# EAGLE board ArduinoBoardPOEv2 (EAGLE 7.4.0)
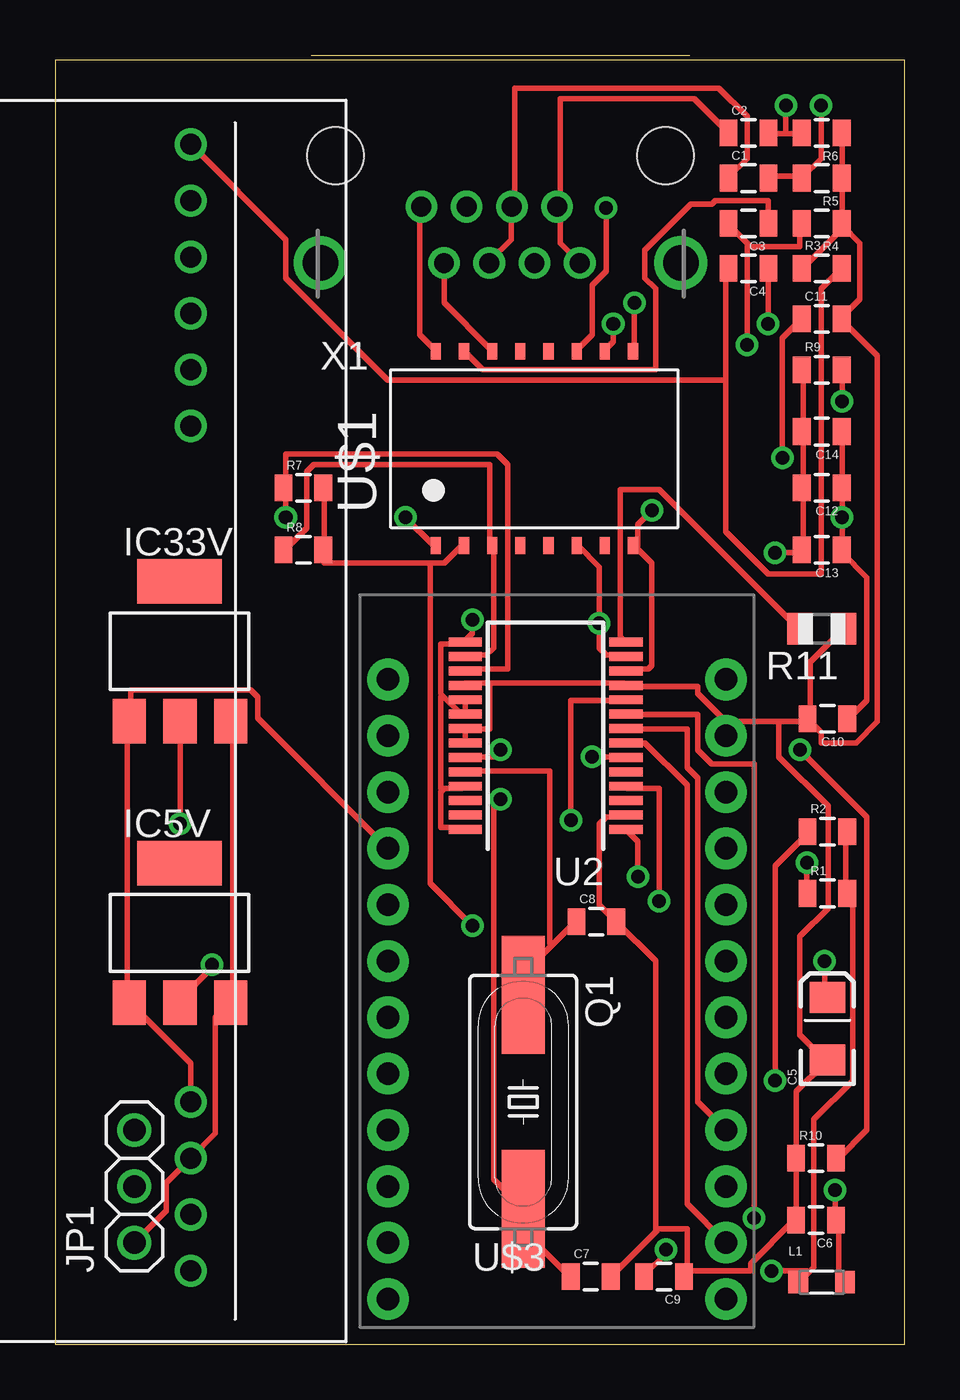
[diagram p0: board, top side]
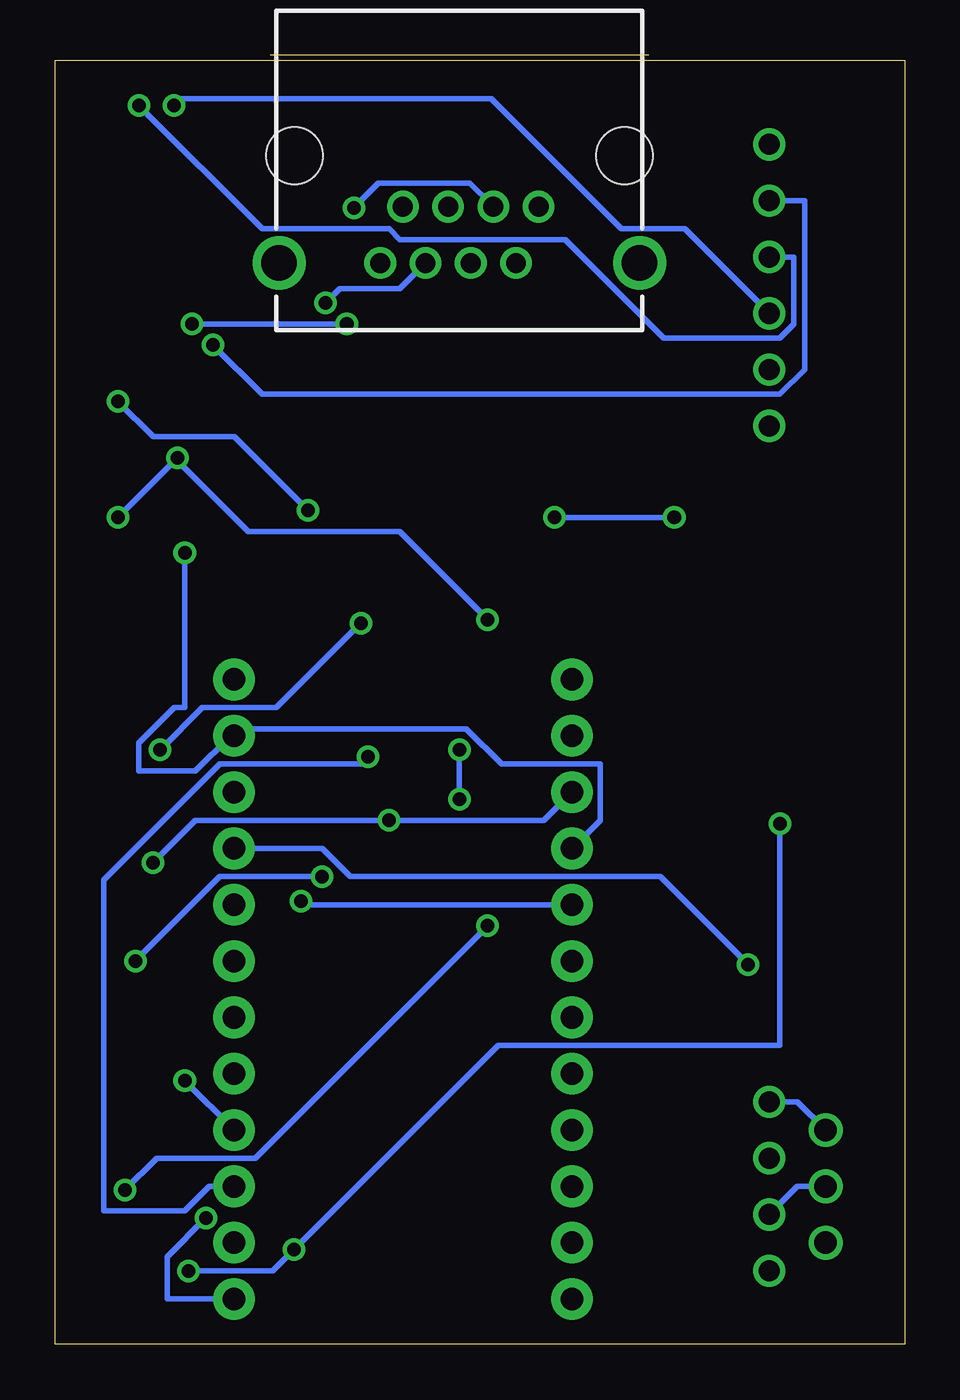
[diagram p1: board, bottom side, seen from below]

Size 38.28 x 57.9 mm. Coordinates in mm from the lower left corner, seen from the top.
Outline: 0,0 38.28,0 38.28,57.9 0,57.9 0,0
Copper layers (1*16): Top 0.035mm / dielectric 1.5mm / Bottom 0.035mm
Design rules "default": minimum track width 10mil, minimum drill 24mil, track to track 8mil, track to pad 8mil, pad to pad 8mil, via to via 8mil, smd to smd 8mil, copper to edge 40mil, drill to drill 8mil, minimum pad ring 10mil, minimum via ring 8mil, stop-mask expansion 4mil, vias tented up to drill 0mil, thermal gap 10mil

## Footprints (pad centres in the part's own frame; a part is rotated, then mirrored left to right if it is on the bottom)
0805 = smd 0.8 x 1.2: 1 -0.9,0; 2 0.9,0
EIA3216 = smd 1.4 x 1.6: A 1.4,0; C -1.4,0
SOT223 = smd 1.499 x 2.007: 1 -2.261,-3.15; 2 0.025,-3.15; 3 2.311,-3.15 | smd 3.81 x 2.007: 4 0,3.15
1X03 = drill 1.016: 1 -2.54,0; 2 0,0; 3 2.54,0
WE-CBA_0805(W=3) = smd 0.9 x 1: 1 -1.05,0; 2 1.05,0
HC49UP = smd 5.334 x 1.93: 1 -4.826,0; 2 4.826,0
R0805 = smd 1.1 x 1.4: 1 -1,0; 2 1,0
SSOP28 = smd 0.4 x 1.5: 1 -4.225,-3.625; 2 -3.575,-3.625; 3 -2.925,-3.625; 4 -2.275,-3.625; 5 -1.625,-3.625; 6 -0.975,-3.625; 7 -0.325,-3.625; 8 0.325,-3.625; 9 0.975,-3.625; 10 1.625,-3.625; 11 2.275,-3.625; 12 2.925,-3.625; 13 3.575,-3.625; 14 4.225,-3.625; 15 4.225,3.625; 16 3.575,3.625; 17 2.925,3.625; 18 2.275,3.625; 19 1.625,3.625; 20 0.975,3.625; 21 0.325,3.625; 22 -0.325,3.625; 23 -0.975,3.625; 24 -1.625,3.625; 25 -2.275,3.625; 26 -2.925,3.625; 27 -3.575,3.625; 28 -4.225,3.625
749013011 = smd 0.762 x 0.457: 1 -4.381,4.445; 2 -4.381,3.175; 3 -4.381,1.905; 4 -4.381,0.635; 5 -4.381,-0.635; 6 -4.381,-1.905; 7 -4.381,-3.175; 8 -4.381,-4.445; 9 4.381,-4.445; 10 4.381,-3.175; 11 4.381,-1.905; 12 4.381,-0.635; 13 4.381,0.635; 14 4.381,1.905; 15 4.381,3.175; 16 4.381,4.445
AG9000 = drill 0.95 pad 1.422: P$1 0,0; P$2 2.54,0; P$3 5.08,0; P$4 7.62,0; P$5 10.16,0; P$6 12.7,0; P$7 43.18,0; P$8 45.72,0; P$9 48.26,0; P$10 50.8,0
ARDUINO_MINI = drill 1.016 pad 1.88: 1 -7.62,12.7; 2 -7.62,10.16; 3 -7.62,7.62; 4 -7.62,5.08; 5 -7.62,2.54; 6 -7.62,0; 7 -7.62,-2.54; 8 -7.62,-5.08; 9 -7.62,-7.62; 10 -7.62,-10.16; 11 -7.62,-12.7; 12 -7.62,-15.24; 13 7.62,-15.24; 14 7.62,-12.7; 15 7.62,-10.16; 16 7.62,-7.62; 17 7.62,-5.08; 18 7.62,-2.54; 19 7.62,0; 20 7.62,2.54; 21 7.62,5.08; 22 7.62,7.62; 23 7.62,10.16; 24 7.62,12.7
GLX-S-88M = drill 0.9 pad 1.422: 1 -3.57,-2.3; 2 -2.55,-4.84; 3 -1.53,-2.3; 4 -0.51,-4.84; 5 0.51,-2.3; 6 1.53,-4.84; 7 2.55,-2.3; 8 3.57,-4.84 | drill 1.6 pad 2.184: S1 -8.125,-4.84; S2 8.125,-4.84 | hole 2.55: -7.44,0; 7.44,0

## Placement (x,y rotation side)
C1  22nf  [0805]  31.24,52.58 0 top
C2  22nf  [0805]  31.24,54.61 0 top
C3  22nf  [0805]  31.24,50.55 180 top
C4  22nf  [0805]  31.24,48.51 180 top
C5  10uF  [EIA3216]  34.8,14.22 90 top
C6  100nf  [0805]  34.29,5.59 180 top
C7  10pf  [0805]  24.13,3.05 0 top
C8  10pf  [0805]  24.38,19.05 0 top
C9  100nf  [0805]  27.43,3.05 180 top
C10  100nf  [0805]  34.8,28.19 180 top
C11  100nf  [0805]  34.54,46.23 0 top
C12  100nf  [0805]  34.54,38.61 180 top
C13  100nf  [0805]  34.54,35.81 180 top
C14  100nf  [0805]  34.54,41.15 180 top
IC5V  REG1117  [SOT223]  5.59,18.54 0 top
IC33V  REG1117  [SOT223]  5.59,31.24 0 top
JP1  [1X03]  3.56,7.11 90 top
L1  2000 ohm  [WE-CBA_0805(W=3)]  34.54,2.79 0 top
Q1  25mhz  [HC49UP]  21.08,10.92 270 top
R1  10K  [0805]  34.8,20.32 0 top
R2  100K  [0805]  34.8,23.11 0 top
R3  75 ohm  [0805]  34.54,48.51 0 top
R4  75 ohm  [0805]  34.54,50.55 180 top
R5  75 ohm  [0805]  34.54,52.58 180 top
R6  75 ohm  [0805]  34.54,54.61 180 top
R7  49.9/1%  [0805]  11.18,38.61 0 top
R8  49.9/1%  [0805]  11.18,35.81 0 top
R9  49.9/1%  [0805]  34.54,43.94 0 top
R10  49.9/1%  [0805]  34.29,8.38 0 top
R11  2k/1%  [R0805]  34.54,32.26 180 top
U2  ENC28J60-SSOP  [SSOP28]  22.1,27.43 90 top
U$1  749013011  [749013011]  21.59,40.39 90 top
U$2  AG9XX0  [AG9000]  6.1,54.1 270 top
U$3  ARDUINO_MINI  [ARDUINO_MINI]  22.61,17.27 0 top
X1  GLX-S-88M  [GLX-S-88M]  20.07,53.59 0 top

## Library data of the parts
C1-C4 C6-C14 = SparkFun-Capacitors
C5 = SparkFun-Capacitors; PROD_ID: CAP-00811
IC5V IC33V = burr-brown; MPN: REG1117; OC_FARNELL: 1097566; OC_NEWARK: 14P6981
JP1 R11 = Adafruit
L1 = SignalCommunications
Q1 = Adafruit; OC_FARNELL: unknown; OC_NEWARK: unknown
R1-R10 = SparkFun-Resistors
U2 = microchip-enc28j60
U$1 = Wurth_Electronics_Midcom_Speedy_and_standard_magnetics
U$2 = SmartPrj
U$3 = SparkFun-Boards
X1 = con-kycon; OC_FARNELL: unknown; OC_NEWARK: unknown

## Nets
+3V3: C9.2 IC33V.2 L1.1 R1.2 R2.2
+5V: IC5V.2 U$3.21
+12V: IC5V.3 IC33V.3 JP1.1 U$2.P$8
CLKOUT: U2.3
CS: U2.9 U$3.13
GND: C5.C C6.2 C7.2 C8.2 C9.1 C10.2 C11.2 C12.2 C13.2 C14.2 IC5V.1 IC33V.1 JP1.3 R3.1 R4.1 R5.1 R6.1 R9.1 R10.1 R11.1 U2.2 U2.11 U2.18 U2.21 U2.22 U$2.P$7 U$3.4 U$3.23
INT: U2.4 U$3.5
MISO: U2.6 U$3.15
MOSI: U2.7 U$3.14
N$1: U$1.16 X1.1
N$2: U$1.14 X1.2
N$3: U$1.11 X1.3
N$4: U$1.9 X1.6
N$5: C2.1 X1.7 X1.8
N$6: C1.1 X1.4 X1.5
N$7: C3.1 U$1.15
N$8: C4.1 U$1.10
N$9: C6.1 L1.2 R7.2 R8.2 U$1.2
N$10: C7.1 Q1.2 U2.23
N$11: JP1.2 U$2.P$9
N$13: C8.1 Q1.1 U2.24
N$14: C10.1 C11.1 C12.1 C13.1 C14.1 U2.15 U2.19 U2.20 U2.25 U2.28
N$16: C5.A U2.1
N$17: R11.2 U2.14
RST: R1.1 U2.10 U$3.3
SCK: R2.1 U2.8 U$3.16
TPIN+: R10.2 U2.13 U$1.6
TPIN-: R9.2 U2.12 U$1.8
TPOUT+: R7.1 U2.17 U$1.1
TPOUT-: R8.1 U2.16 U$1.3
VA1: C4.2 R3.2 U$2.P$1
VA2: C3.2 R4.2 U$2.P$2
VB1: C1.2 R5.2 U$2.P$3
VB2: C2.2 R6.2 U$2.P$4
WOL: U2.5

## Tracks (layer width: path | path; a pad name or v marks a point on that pad's centre or on a via)
+3V3  (via drill 0.61)
  Top 0.254: 33.96,3.22 34.2,3.46 34.2,10.13 35.94,11.88 35.94,20.13 35.78,20.29 R1.2 35.62,20.45 35.62,22.99 R2.2 | 33.96,3.22 33.56,2.83 L1.1 | v27.53,4.25 27.53,4.1 26.58,3.14 C9.2 | v32.29,3.3 33.88,3.3 33.96,3.22 | v5.62,23.46 5.62,28.07 IC33V.2
  Bottom 0.254: v32.29,3.3 28.48,3.3 v27.53,4.25 18.32,13.46 5.62,13.46 v5.62,23.46
+5V  (via drill 0.61)
  Top 0.254: v7.05,17.11 7.05,16.95 5.62,15.53 IC5V.2
  Bottom 0.254: v7.05,17.11 11.02,21.08 24.99,21.08 26.26,22.35 U$3.21
+12V
  Top 0.254: IC33V.3 8,28.07 8,15.53 IC5V.3 7.84,15.37 7.21,14.73 7.21,9.49 U$2.P$8 4.98,7.27 4.98,6 JP1.1
CS  (via drill 0.61)
  Top 0.254: v31.5,5.68 31.5,26.16 29.59,26.16 28.96,26.8 28.96,28.38 25.78,28.38 U2.9
  Bottom 0.254: v31.5,5.68 33.24,3.94 33.24,2.03 U$3.13
GND  (via drill 0.61)
  Top 0.254: U$2.P$7 6.1,12.67 3.4,15.37 IC5V.1 3.24,15.53 3.24,28.07 IC33V.1 3.4,28.23 3.4,29.5 8.79,29.5 9.11,29.18 9.11,28.23 U$3.4 | U2.2 25.62,23.78 24.83,23.78 24.51,23.46 24.51,19.81 25.15,19.18 C8.2 25.3,19.02 27.05,17.27 27.05,5.21 27.13,5.13 | 27.13,5.13 27.21,5.21 28.48,5.21 28.48,3.3 | 27.13,5.13 25.15,3.14 C7.2 | 28.48,3.3 28.48,3.14 C9.1 28.48,3.3 | 33.4,8.38 33.4,5.68 C6.2 33.24,5.53 31.34,3.62 31.34,3.3 28.48,3.3 | 33.4,8.38 33.4,11.4 34.67,12.67 C5.C 34.67,12.83 33.56,13.94 33.56,18.38 34.83,19.65 34.83,24.26 32.61,26.48 32.61,28.07 | 33.4,8.38 R10.1 | 18.48,27.75 U2.22 | 19.59,29.81 25.62,29.81 U2.11 25.78,29.65 28.96,29.65 28.96,29.34 30.23,28.07 | 19.59,29.81 18.48,29.81 U2.18 | 18.48,27.75 19.59,27.75 19.59,29.81 | 18.48,27.75 U2.21 | R6.1 35.46,54.58 35.46,52.67 R5.1 35.46,52.51 35.46,50.61 R4.1 | R4.1 35.46,50.45 36.26,49.66 36.26,47.12 35.46,46.32 C11.2 35.46,46.16 37.05,44.58 37.05,28.07 36.1,27.11 34.51,27.11 34.51,27.59 34.04,28.07 C10.2 | R3.1 33.72,48.55 35.46,50.29 R4.1 | R9.1 33.72,43.94 33.72,41.24 C14.2 33.72,41.08 33.72,38.7 C12.2 33.72,38.54 33.72,35.85 C13.2 33.56,35.69 v32.45,35.69 | 30.23,28.07 32.61,28.07 | 32.61,28.07 33.88,28.07 C10.2 | R11.1 35.46,32.2 34.04,30.77 34.04,28.23 C10.2 | 30.23,28.07 U$3.23
  Bottom 0.254: JP1.3 4.83,10.92 U$2.P$7 | v32.45,35.69 32.45,28.7 32.92,28.7 34.51,27.11 34.51,25.84 31.97,25.84 30.38,27.43 U$3.23 29.91,27.75 19.75,27.75 18.16,26.16 13.72,26.16 13.72,23.62 U$3.4
INT  (via drill 0.61)
  Top 0.254: v27.21,19.97 27.21,25.05 25.78,25.05 U2.4
  Bottom 0.254: v27.21,19.97 27.05,19.81 U$3.5
MISO  (via drill 0.61)
  Top 0.254: v24.19,26.48 25.62,26.48 U2.6
  Bottom 0.254: v24.19,26.48 24.51,26.16 30.86,26.16 36.1,20.92 36.1,6 32.45,6 31.34,7.11 U$3.15
MOSI
  Top 0.254: U$3.14 28.48,6.32 28.48,25.21 26.58,27.11 25.78,27.11 U2.7
N$1
  Top 0.254: U$1.16 17.05,44.9 16.41,45.53 16.41,51.24 X1.1
N$2
  Top 0.254: U$1.14 19.59,44.9 17.53,46.96 17.53,48.7 X1.2
N$3  (via drill 0.61)
  Top 0.254: v24.83,51.24 24.83,48.39 24.19,47.75 24.19,45.53 23.56,44.9 U$1.11
  Bottom 0.254: v24.83,51.24 23.72,52.36 19.59,52.36 18.64,51.4 X1.3
N$4  (via drill 0.61)
  Top 0.254: v26.1,46.96 26.1,44.9 U$1.9
  Bottom 0.254: v26.1,46.96 25.46,47.59 22.77,47.59 21.65,48.7 X1.6
N$5
  Top 0.254: C2.1 30.23,54.74 28.8,56.17 22.77,56.17 22.77,51.4 X1.7 22.77,51.24 22.77,49.66 23.56,48.86 X1.8
N$6
  Top 0.254: C1.1 30.38,52.67 31.18,53.47 31.18,55.37 29.91,56.64 20.7,56.64 20.7,51.4 X1.5 20.54,51.24 20.54,49.82 19.59,48.86 X1.4
N$7
  Top 0.254: U$1.15 18.48,44.74 19.27,43.94 27.05,43.94 27.05,47.59 26.58,48.07 26.58,49.34 28.64,51.4 29.59,51.4 29.75,51.56 32.13,51.56 32.13,50.61 C3.1
N$8  (via drill 0.61)
  Top 0.254: v25.15,46.01 25.15,45.21 24.83,44.9 U$1.10 | v32.13,46.01 32.13,48.39 C4.1
  Bottom 0.254: v32.13,46.01 v25.15,46.01
N$9  (via drill 0.61)
  Top 0.254: L1.2 35.46,2.83 35.31,2.98 35.31,5.53 C6.1 35.15,5.68 v35.15,6.95 | 16.89,35.21 12.13,35.21 12.13,35.69 R8.2 12.13,35.85 12.13,38.54 R7.2 | 16.89,35.21 17.53,35.21 18.32,36 U$1.2 | v18.8,18.86 16.89,20.77 16.89,35.21
  Bottom 0.254: v35.15,6.95 33.72,8.38 29.27,8.38 v18.8,18.86
N$10  (via drill 0.61)
  Top 0.254: C7.1 23.08,3.14 21.18,5.05 21.18,6 Q1.2 19.75,7.43 19.75,24.26 v20.07,24.57 | v20.07,26.8 20.07,26.48 18.48,26.48 U2.23
  Bottom 0.254: v20.07,24.57 v20.07,26.8
N$11
  Bottom 0.254: U$2.P$9 4.83,7.11 JP1.2
N$13
  Top 0.254: 22.37,17.99 21.18,16.8 21.18,15.84 Q1.1 | 22.37,17.99 23.4,19.02 C8.1 | U2.24 18.48,25.84 22.29,25.84 22.29,18.07 22.37,17.99
N$14  (via drill 0.61)
  Top 0.254: 17.45,24.97 17.53,25.05 18.32,25.05 U2.25 | 17.45,24.97 17.37,24.89 17.37,23.3 18.32,23.3 U2.28 | U2.19 18.48,29.02 18.48,28.54 U2.20 18.32,28.38 17.45,29.26 | 17.45,29.26 17.37,29.34 17.37,31.56 18.32,31.56 U2.15 18.48,31.72 18.8,32.04 v18.8,32.67 | 17.45,24.97 17.37,25.05 17.37,29.18 17.45,29.26 | C14.1 35.46,41.08 35.46,38.7 C12.1 35.46,38.54 v35.46,37.27 35.46,35.85 C13.1 35.46,35.69 36.58,34.58 36.58,29.02 35.78,28.23 C10.1 | v32.77,39.97 32.77,45.37 33.56,46.16 C11.1
  Bottom 0.254: v35.46,37.27 v32.77,39.97 32.77,39.81 29.59,36.64 22.77,36.64 v18.8,32.67
N$16  (via drill 0.61)
  Top 0.254: v26.26,21.08 26.26,22.67 25.78,23.15 U2.1 | v34.67,17.27 34.67,15.68 C5.A
  Bottom 0.254: v26.26,21.08 30.86,21.08 v34.67,17.27
N$17
  Top 0.254: R11.2 33.4,32.35 27.21,38.54 25.46,38.54 25.46,31.88 25.62,31.72 U2.14
RST  (via drill 0.61)
  Top 0.254: v33.88,21.72 33.88,20.45 R1.1 | v23.24,23.62 23.24,29.02 25.62,29.02 U2.10
  Bottom 0.254: v33.88,21.72 31.97,23.62 v23.24,23.62 16.26,23.62 U$3.3
SCK  (via drill 0.61)
  Top 0.254: v32.45,11.88 32.45,21.56 33.88,22.99 R2.1 | U$3.16 28.96,10.92 28.96,25.53 28.48,26 28.48,27.75 25.78,27.75 U2.8
  Bottom 0.254: U$3.16 v32.45,11.88
TPIN+  (via drill 0.61)
  Top 0.254: U$1.6 23.56,36 24.51,35.05 v24.51,32.51 24.51,31.4 24.83,31.08 25.62,31.08 U2.13 | v33.56,26.8 36.58,23.78 36.58,9.65 35.31,8.38 R10.2
  Bottom 0.254: v33.56,26.8 31.66,28.7 28.32,28.7 v24.51,32.51
TPIN-  (via drill 0.61)
  Top 0.254: U2.12 25.78,30.45 26.73,30.45 26.89,30.61 26.89,35.21 26.1,36 U$1.8 26.26,36 26.26,36.96 v26.89,37.59 | v35.46,42.51 35.46,43.94 R9.2
  Bottom 0.254: v35.46,42.51 33.88,40.93 30.23,40.93 v26.89,37.59
TPOUT+  (via drill 0.61)
  Top 0.254: v15.78,37.27 17.05,36 U$1.1 | v10.38,37.27 10.38,38.54 R7.1 10.38,38.7 10.38,40.13 19.91,40.13 20.38,39.66 20.38,30.45 18.48,30.45 U2.17
  Bottom 0.254: v10.38,37.27 v15.78,37.27
TPOUT-
  Top 0.254: U2.16 18.48,31.08 19.43,31.08 19.75,31.4 19.75,36 U$1.3 19.59,36 19.59,39.66 11.65,39.66 11.34,39.34 11.34,36.8 10.38,35.85 R8.1
VA1
  Top 0.254: 30.23,43.47 30.23,36.64 32.13,34.73 34.51,34.73 34.51,47.59 35.31,48.39 R3.2 | 30.23,43.47 30.23,48.39 C4.2 | U$2.P$1 10.38,49.82 10.38,48.07 14.99,43.47 30.23,43.47
VA2  (via drill 0.61)
  Top 0.254: 31.26,49.58 31.34,49.5 33.56,49.5 33.56,50.45 R4.2 | 31.26,49.58 30.38,50.45 C3.2 | v31.18,45.05 31.18,49.5 31.26,49.58
  Bottom 0.254: v31.18,45.05 28.96,42.83 5.62,42.83 4.51,43.94 4.51,51.56 U$2.P$2
VB1  (via drill 0.61)
  Top 0.254: C1.2 32.29,52.67 33.56,52.67 R5.2 33.72,52.67 34.51,53.47 v34.51,55.85
  Bottom 0.254: v34.51,55.85 28.96,50.29 23.24,50.29 22.77,49.82 15.3,49.82 10.86,45.37 5.62,45.37 4.98,46.01 4.98,49.02 U$2.P$3
VB2  (via drill 0.61)
  Top 0.254: 32.92,54.58 33.56,54.58 R6.2 | 32.92,54.58 32.29,54.58 C2.2 | v32.92,55.85 32.92,54.58
  Bottom 0.254: v32.92,55.85 32.61,56.17 18.64,56.17 12.76,50.29 9.91,50.29 U$2.P$4